# EAGLE board Cool Fyyran (EAGLE 9.7.0)

Size 235.89 x 182.46 mm. Coordinates in mm from the lower left corner, seen from the top.
Outline: 0,0 235.89,0 235.89,182.46 0,182.46 0,0
Copper layers (1*16): Top 0.035mm / dielectric 1.5mm / Bottom 0.035mm
Design rules "default": minimum track width 6mil, minimum drill 0.35mm, track to track 6mil, track to pad 6mil, pad to pad 6mil, via to via 6mil, smd to smd 6mil, copper to edge 40mil, drill to drill 6mil, minimum pad ring 10mil, minimum via ring 8mil, stop-mask expansion 4mil, vias tented up to drill 0mil, thermal gap 10mil

## Footprints (pad centres in the part's own frame; a part is rotated, then mirrored left to right if it is on the bottom)
MOTOR = drill 1.118 pad 3.15 octagon: + 2.54,0; - -2.54,0
PIEZO = drill 1 pad 1.6: 1 -3.5,0; 2 3.5,0
28015 = drill 1.016 long: 1 -2.54,0; 2 0,0; 3 2.54,0
RESAD1016W63L850D250B = drill 0.83 pad 1.43: 1 -5.08,0; 2 5.08,0
HA-06-SM065 = drill 1 pad 1.676: 1 -2.54,-2.54; 2 0,2.54; 3 2.54,-2.54
SEN-13322 = drill 1.016 long: 1 -2.54,0; 2 0,0; 3 2.54,0
SG90 = drill 1.016 long: 1 -2.54,0; 2 0,0; 3 2.54,0
ARDUINO-UNO-R3-SHIELD = drill 1.016 pad 1.88: 3.3V 24.13,-2.54; 5V 24.13,0; A0 24.13,12.7; A1 24.13,15.24; A2 24.13,17.78; A3 24.13,20.32; A4 24.13,22.86; A5 24.13,25.4; AREF -24.13,-13.97; D2 -24.13,20.32; D3 -24.13,17.78; D4 -24.13,15.24; D5 -24.13,12.7; D6 -24.13,10.16; D7 -24.13,7.62; D8 -24.13,3.81; D9 -24.13,1.27; D10 -24.13,-1.27; D11 -24.13,-3.81; D12 -24.13,-6.35; D13 -24.13,-8.89; GND@0 24.13,2.54; GND@1 24.13,5.08; GND@2 -24.13,-11.43; IOREF 24.13,-7.62; NC 24.13,-10.16; RES 24.13,-5.08; RX -24.13,25.4; SCL -24.13,-19.05; SDA -24.13,-16.51; TX -24.13,22.86; VIN 24.13,7.62
JHD-162A = drill 1.016 long: 1 -19.05,0; 2 -16.51,0; 3 -13.97,0; 4 -11.43,0; 5 -8.89,0; 6 -6.35,0; 7 -3.81,0; 8 -1.27,0; 9 1.27,0; 10 3.81,0; 11 6.35,0; 12 8.89,0; 13 11.43,0; 14 13.97,0; 15 16.51,0; 16 19.05,0
TO92 = drill 0.813 octagon: 1 -1.27,0; 2 0,1.905; 3 1.27,0

## Placement (x,y rotation side)
M1  MOTOR_HDR  [MOTOR]  227.64,56.6 0 top
PIEZO1  PIEZO  [PIEZO]  96.77,39.04 0 top
PING1  DISTANCE-SENSOR-3PIN  [28015]  116.2,14.9 180 top
R1  220k  [RESAD1016W63L850D250B]  49.78,51.74 90 top
RPOT1  250k  [HA-06-SM065]  34.31,175.41 0 top
SEN1  SEN-13322  [SEN-13322]  215.29,91.82 90 top
SERVO1  SERVOSG90  [SG90]  151.08,9.26 0 top
U1  ARDUINO-UNO-R3-SHIELD  [ARDUINO-UNO-R3-SHIELD]  91.06,139.36 90 top
U2  LCD-16X2JHD-162A  [JHD-162A]  30.73,36.63 0 top
U3  TMP36GT9Z_TO92  [TO92]  193.69,114.11 0 top

## Library data of the parts
M1 PIEZO1 PING1 R1 RPOT1 SEN1 SERVO1 U1-U3 = Tinkercad

## Nets
U1_5V: PING1.2 RPOT1.3 SEN1.1 SERVO1.2 U1.5V U2.2 U2.15 U3.3
U1_A0: SEN1.3 U1.A0
U1_A1: U1.A1 U3.2
U1_A2: RPOT1.2 U1.A2
U1_D2: U1.D2 U2.11
U1_D3: U1.D3 U2.12
U1_D4: U1.D4 U2.13
U1_D5: U1.D5 U2.14
U1_D6: U1.D6 U2.4
U1_D7: U1.D7 U2.6
U1_D8: PING1.3 U1.D8
U1_D9: PIEZO1.1 U1.D9
U1_D10: M1.+ U1.D10
U1_D11: SERVO1.3 U1.D11
U1_GND: M1.- PIEZO1.2 PING1.1 R1.2 RPOT1.1 SEN1.2 SERVO1.1 U1.GND@0 U1.GND@1 U1.GND@2 U2.1 U2.3 U2.5 U3.1
U2_LED-: R1.1 U2.16

## Tracks (layer width: path | path; a pad name or v marks a point on that pad's centre or on a via)
U1_5V  (7 unrouted)
U1_A0  (1 unrouted)
U1_A1  (1 unrouted)
U1_A2  (1 unrouted)
U1_D2  (1 unrouted)
U1_D3  (1 unrouted)
U1_D4  (1 unrouted)
U1_D5  (1 unrouted)
U1_D6  (1 unrouted)
U1_D7  (1 unrouted)
U1_D8  (1 unrouted)
U1_D9  (1 unrouted)
U1_D10  (1 unrouted)
U1_D11  (1 unrouted)
U1_GND  (13 unrouted)
U2_LED-  (1 unrouted)